# EAGLE board Tardis Lightv002 (EAGLE 6.1)
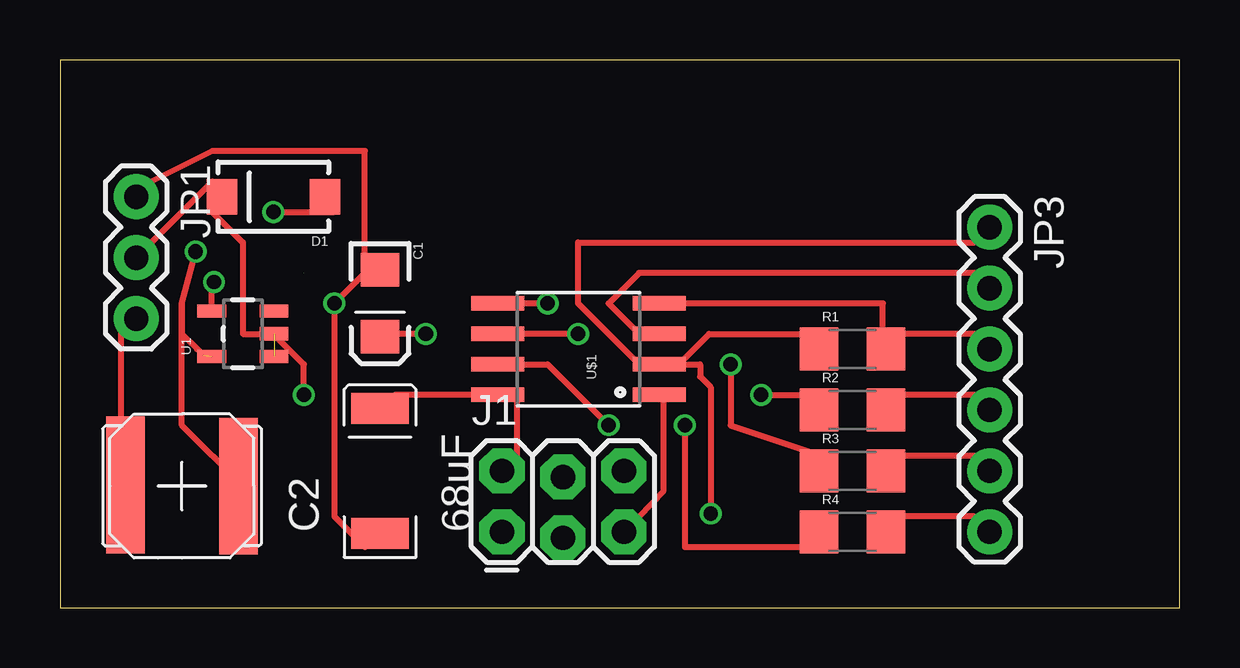
[diagram p0: board, top side]
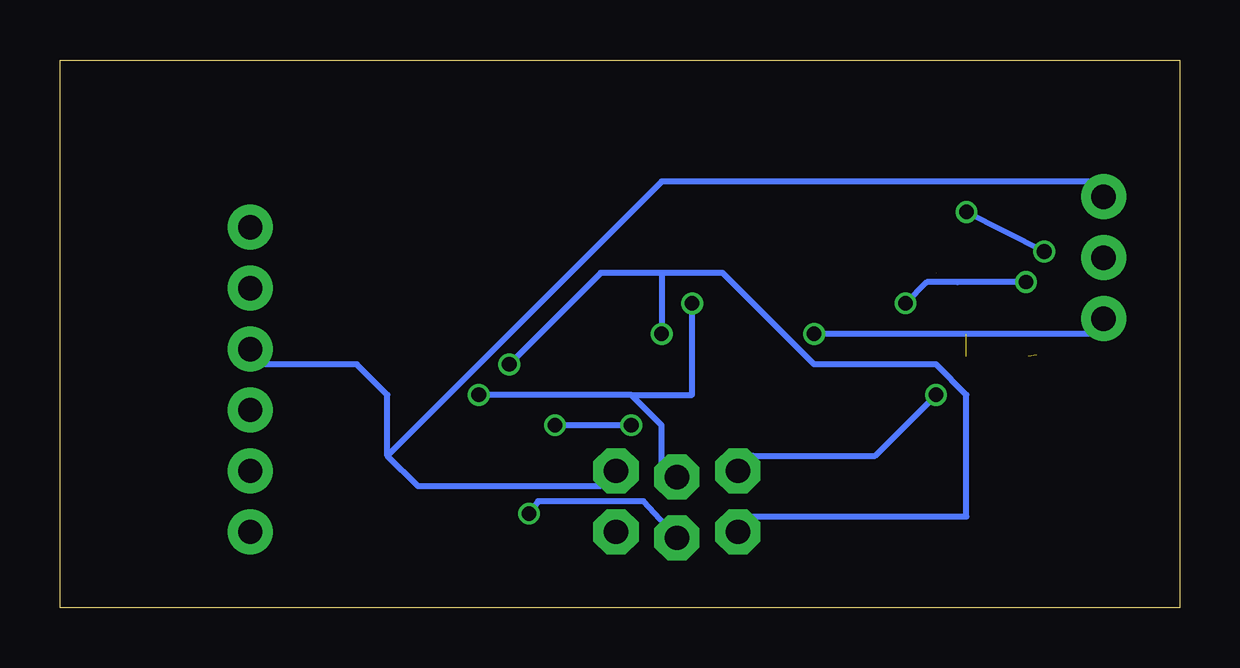
[diagram p1: board, bottom side, seen from below]

Size 46.66 x 22.85 mm. Coordinates in mm from the lower left corner, seen from the top.
Outline: 0,0 46.66,0 46.66,22.85 0,22.85 0,0
Copper layers (1*16): Top 0.035mm / dielectric 1.5mm / Bottom 0.035mm
Design rules: minimum track width 6mil, minimum drill 12mil, track to track 6mil, track to pad 6mil, pad to pad 6mil, via to via 6mil, smd to smd 0mil, copper to edge 10mil, drill to drill 10mil, minimum pad ring 10mil, minimum via ring 6mil, stop-mask expansion 2mil, vias tented up to drill 100mil, thermal gap 10mil

## Footprints (pad centres in the part's own frame; a part is rotated, then mirrored left to right if it is on the bottom)
EIA3216 = smd 1.4 x 1.6: A 1.4,0; C -1.4,0
EIA2917 = smd 1.3 x 2.4: A 2.6,0; C -2.6,0
SMA-DIODE = smd 1.27 x 1.47: A -2.15,0; C 2.15,0
2X3_LOCK = drill 1.016 pad 1.88 octagon: 1 0,0; 2 0,2.54; 3 2.54,-0.254; 4 2.54,2.286; 5 5.08,0; 6 5.08,2.54
1X03 = drill 1.016 pad 1.88: 1 0,0; 2 2.54,0; 3 5.08,0
1X06 = drill 1.016 pad 1.88: 1 0,0; 2 2.54,0; 3 5.08,0; 4 7.62,0; 5 10.16,0; 6 12.7,0
NR6028 = smd 5.7 x 1.6: P$1 -0.05,-2.35; P$2 0,2.35
1206 = smd 1.6 x 1.8: 1 -1.4,0; 2 1.4,0
SOT23-5 = smd 0.55 x 1.2: 1 -0.95,-1.3; 2 0,-1.3; 3 0.95,-1.3; 4 0.95,1.3; 5 -0.95,1.3
SO08-EIAJ = smd 0.61 x 2.21: 1 -1.905,-3.378; 2 -0.635,-3.378; 3 0.635,-3.378; 4 1.905,-3.378; 5 1.905,3.353; 6 0.635,3.353; 7 -0.635,3.353; 8 -1.905,3.353

## Placement (x,y rotation side)
C1  10uF  [EIA3216]  13.33,12.7 270 top
C2  68uF  [EIA2917]  13.33,5.71 90 top
D1  MBRA140  [SMA-DIODE]  8.89,17.14 180 top
J1  AVR_SPI_PRG_62X3_LOCK  [2X3_LOCK]  18.41,3.17 0 top
JP1  [1X03]  3.17,17.14 270 top
JP3  [1X06]  38.74,15.88 270 top
L1  47 uH  [NR6028]  5.08,5.08 270 top
R1  [1206]  33.02,10.79 0 top
R2  [1206]  33.02,8.26 0 top
R3  [1206]  33.02,5.71 0 top
R4  [1206]  33.02,3.17 0 top
U1  NCP1402  [SOT23-5]  7.62,11.43 90 top
U$1  ATTINY45  [SO08-EIAJ]  21.59,10.79 90 top

## Library data of the parts
C1 C2 D1 J1 JP1 JP3 R1-R4 U1 U$1 = SparkFun
L1 = ieee-ucsd-lbr_inductor-bourns Roy Edit

## Nets
A_PIN3: J1.3 JP3.1 R1.1 U$1.2
A_PIN4: JP3.2 U$1.3
GND: C1.C C2.C J1.6 JP1.1 JP3.3 R1.2 U1.4 U$1.4
N$1: JP3.4 R2.2
N$3: D1.A L1.P$2 U1.5
N$6: JP3.5 R3.2
N$7: JP3.6 R4.2
PIN0: J1.4 R2.1 U$1.5
PIN1: J1.1 R3.1 U$1.6
PIN2: R4.1 U$1.7
RST: J1.5 U$1.1
VIN: C1.A JP1.3 L1.P$1
VOUT: C2.A D1.C J1.2 JP1.2 U1.1 U1.2 U$1.8

## Tracks (layer width: path | path; a pad name or v marks a point on that pad's centre or on a via)
A_PIN3  (via drill 0.6 pad 0.25)
  Top 0.254: 25.78,10.16 27.05,11.43 31.75,11.43 R1.1 | 25.78,10.16 U$1.2 24.13,10.16 | 24.13,10.16 21.59,12.7 21.59,15.24 38.1,15.24 JP3.1 | 24.13,10.16 25.78,10.16 | 25.78,10.16 26.67,10.16 26.67,9.65 27.11,9.21 v27.11,3.94
  Bottom 0.254: J1.3 22.35,4.45 26.73,4.45 v27.11,3.94
A_PIN4
  Top 0.254: U$1.3 24.13,11.43 22.86,12.7 24.13,13.97 38.1,13.97 JP3.2
GND  (via drill 0.6 pad 0.25)  (2 unrouted)
  Top 0.254: 34.29,11.43 38.1,11.43 JP3.3 | 34.29,11.43 R1.2 34.29,11.43 | 34.29,11.43 34.29,12.7 25.4,12.7 U$1.4 | 12.7,13.97 C1.C 12.7,13.97 | C2.C 12.7,2.54 11.43,3.81 v11.43,12.7 12.7,13.97 | 12.7,13.97 12.7,19.05 6.35,19.05 3.81,17.78 JP1.1 | v6.41,13.59 6.32,13.49 U1.4
  Bottom 0.254: 33.02,6.35 31.75,5.08 24.13,5.08 J1.6 | 33.02,6.35 21.59,17.78 3.81,17.78 JP1.1 | v6.41,13.59 9.27,13.59 10.54,13.59 v11.43,12.7 | 33.02,6.35 33.02,8.89 34.29,10.16 38.1,10.16 JP3.3
N$1
  Top 0.254: R2.2 34.29,8.89 38.1,8.89 JP3.4
N$3  (via drill 0.61)  (1 unrouted)
  Top 0.254: v8.89,16.51 11.43,16.51 D1.A | 5.08,12.7 v5.65,14.86 | 5.08,11.43 5.08,7.62 7.62,5.08 L1.P$2 | 5.08,11.43 5.08,12.7 | 5.08,12.7 5.08,11.43 | 5.08,11.43 5.71,10.79 | 5.08,12.7 5.08,11.43 | 5.08,11.43 5.97,10.54
  Bottom 0.254: v5.65,14.86 v8.89,16.51
N$6
  Top 0.254: R3.2 34.29,6.35 38.1,6.35 JP3.5
N$7
  Top 0.254: R4.2 34.29,3.81 38.1,3.81 JP3.6
PIN0  (via drill 0.61)
  Top 0.254: v29.21,8.89 31.75,8.89 R2.1 | v20.32,12.7 19.05,12.7 U$1.5
  Bottom 0.254: 22.86,8.89 v29.21,8.89 | 22.86,8.89 21.59,7.62 21.59,5.08 J1.4 | v20.32,12.7 20.32,8.89 22.86,8.89
PIN1  (via drill 0.61)
  Top 0.254: v27.94,10.16 27.94,7.62 31.75,6.35 R3.1 | v21.59,11.43 19.05,11.43 U$1.6
  Bottom 0.254: v27.94,10.16 24.13,13.97 21.59,13.97 | 21.59,13.97 19.05,13.97 15.24,10.16 10.16,10.16 8.89,8.89 8.89,3.81 17.78,3.81 J1.1 | 21.59,13.97 v21.59,11.43
PIN2  (via drill 0.61)
  Top 0.254: v26.04,7.62 26.04,2.54 31.75,2.54 R4.1 | v22.86,7.62 20.32,10.16 19.05,10.16 U$1.7
  Bottom 0.254: v26.04,7.62 25.4,7.62 v22.86,7.62
RST
  Top 0.254: U$1.1 25.15,8.7 25.15,4.89 24.13,3.81 J1.5
VIN  (via drill 0.61)
  Top 0.254: v15.24,11.43 13.97,11.43 C1.A | L1.P$1 2.54,6.35 2.54,11.43 JP1.3
  Bottom 0.254: v15.24,11.43 3.81,11.43 JP1.3
VOUT  (via drill 0.61)  (1 unrouted)
  Top 0.254: 8.89,11.43 7.62,11.43 7.62,15.24 6.35,16.51 D1.C 6.35,17.78 3.81,15.24 JP1.2 | 8.89,11.43 U1.2 8.89,11.43 | J1.2 19.05,6.35 19.05,8.89 U$1.8 17.78,8.89 13.97,8.89 C2.A | 8.89,11.43 10.16,10.16 v10.16,8.89
  Bottom 0.254: v10.16,8.89 12.7,6.35 17.78,6.35 J1.2